# EAGLE board mechanical_switch (EAGLE 5.06)
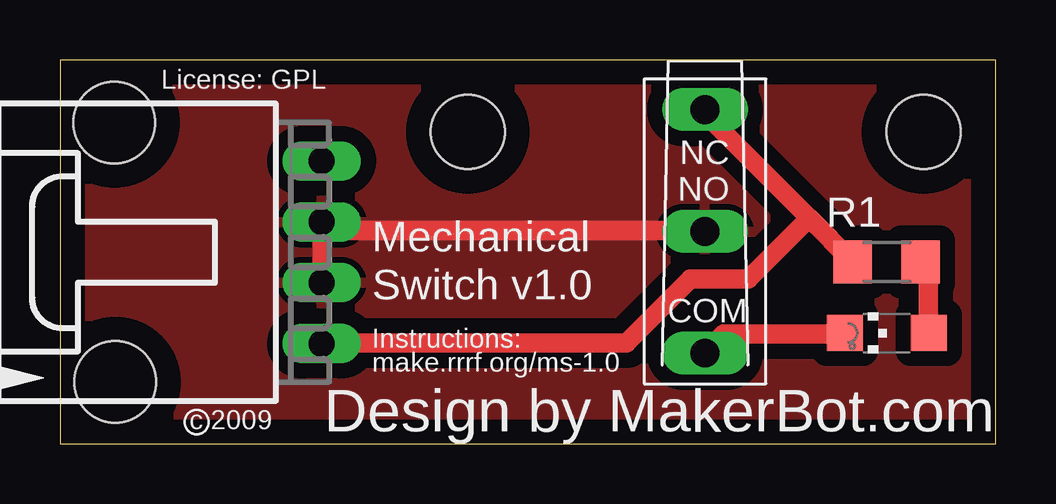
[diagram p0: board, top side]
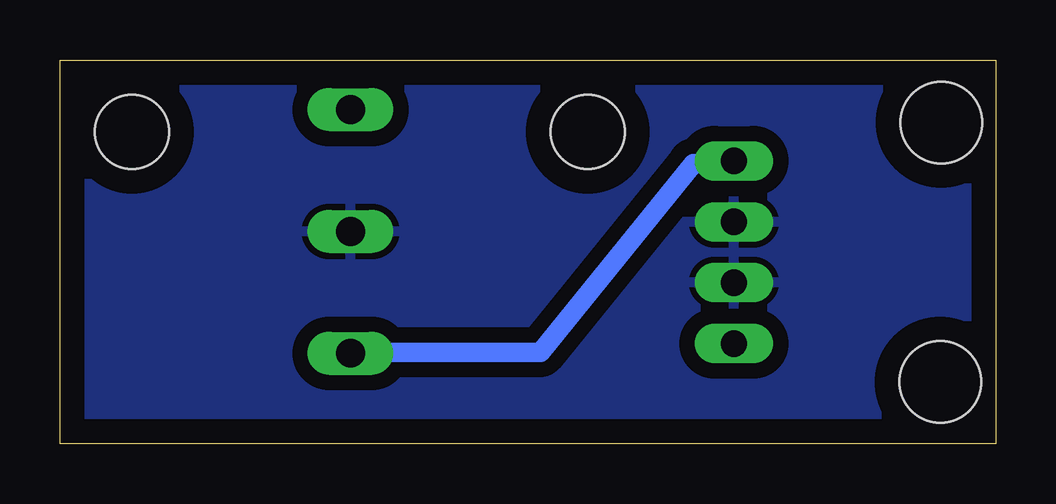
[diagram p1: board, bottom side, seen from below]

Size 39 x 16 mm. Coordinates in mm from the lower left corner, seen from the top.
Outline: 0,0 39,0 39,16 0,16 0,0
Copper layers (1*16): Top 0.035mm / dielectric 1.5mm / Bottom 0.035mm
Design rules "default": minimum track width 10mil, minimum drill 24mil, track to track 8mil, track to pad 8mil, pad to pad 8mil, via to via 8mil, smd to smd 8mil, copper to edge 40mil, drill to drill 8mil, minimum pad ring 10mil, minimum via ring 8mil, stop-mask expansion 4mil, vias tented up to drill 0mil, thermal gap 10mil
Net classes: 0 default: width 0.813 mm, drill 0.635 mm, clearance 0.635 mm

## Footprints (pad centres in the part's own frame; a part is rotated, then mirrored left to right if it is on the bottom)
CHIPLED_1206 = smd 1.5 x 1.5: A 0,-1.75; C 0,1.75
R1206 = smd 1.6 x 1.803: 1 -1.422,0; 2 1.422,0
70553-04 = drill 1.092 long: 1 -3.81,-7.62; 2 -1.27,-7.62; 3 1.27,-7.62; 4 3.81,-7.62 | hole 3.4: -5.41,0.98; 5.41,1.02
OMRON-D2F = drill 1.2 long: COM 1.27,2.54; NC 11.43,2.54; NO 6.35,2.54
3MMHOLE = hole 3.1: 0,0

## Placement (x,y rotation side)
DETECT  [CHIPLED_1206]  34.46,4.61 90 top
R1  [R1206]  34.46,7.57 180 top
U$1  CDROM  [70553-04]  3.29,7.98 90 top
U$2  OMRON-D2F  [OMRON-D2F]  29.43,2.5 90 top
U$5  3MMHOLE  [3MMHOLE]  17,13 0 top
U$6  3MMHOLE  [3MMHOLE]  36,13 0 top

## Library data of the parts
DETECT = led
R1 = rcl
U$1 U$2 U$5 U$6 = reprap

## Nets
GND: U$1.2 U$1.3 U$2.NO
N$1: DETECT.A R1.1
N$2: DETECT.C U$1.4 U$2.COM
VCC: R1.2 U$1.1 U$2.NC

## Tracks (layer width: path | path; a pad name or v marks a point on that pad's centre or on a via)
GND
  Top 0.813: U$1.2 10.92,6.73 10.92,9.14 U$1.3 11.3,8.89 26.8,8.89 U$2.NO
  pour Top: -1,17 40,17 40,-1 -1,-1
  pour Bottom: -1,17 40,17 40,-1 -1,-1
N$1
  Top 0.813: DETECT.A 36.2,4.7 36.2,7.24 35.94,7.49 R1.1
N$2
  Top 0.813: DETECT.C 32.64,4.57 27.69,4.57 26.92,3.81 U$2.COM
  Bottom 0.813: U$1.4 10.92,11.68 12.6,11.68 18.97,3.81 26.8,3.81 U$2.COM
VCC
  Top 0.813: 31.24,9.4 26.8,13.84 U$2.NC | 31.24,9.4 33.02,7.62 R1.2 | U$1.1 10.92,4.19 23.62,4.19 26.29,6.86 28.7,6.86 31.24,9.4

## Text on the board
tPlace: License: GPL | Mechanical | Switch v1.0 | Instructions: | make.rrrf.org/ms-1.0 | c 2009 | Design by MakerBot.com